# Altium PCB BLE_ADS_ver02.PcbDoc (part 1 of 2)
Units mm, origin at the board's own origin, x right, y up, seen from the top; angles counter-clockwise.
Board outline 74.47 x 53.97 mm, 4 copper layers (Top Layer, GND, PWR, Bottom Layer), stack 0.778 mm thick; 104 components, 72 nets, 369 pads, 122 vias.
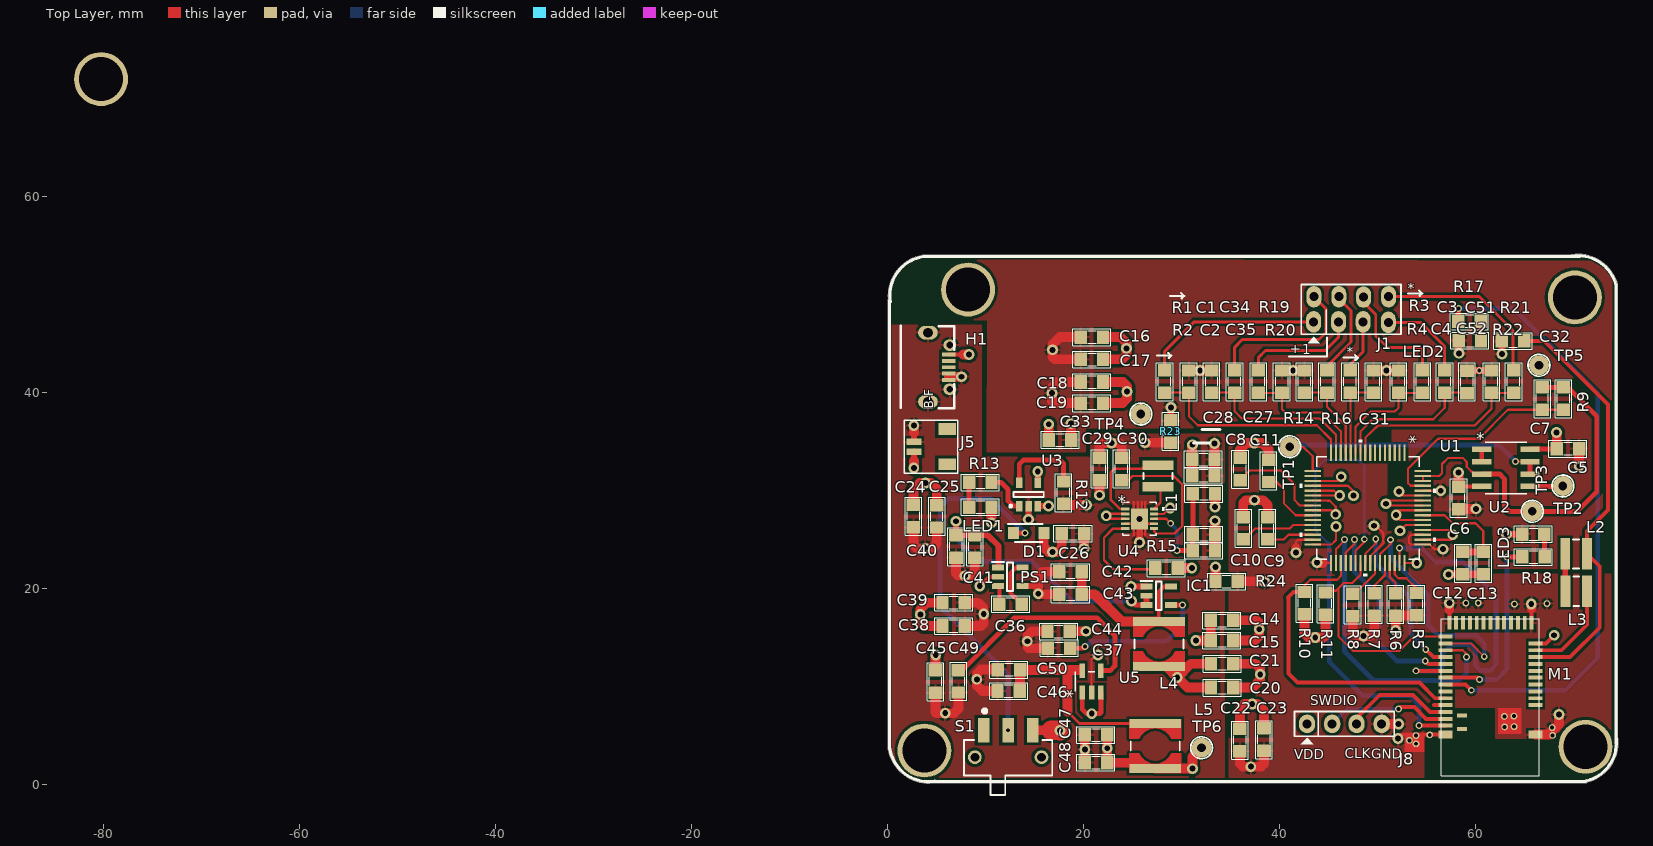
[diagram p0: Top Layer view]
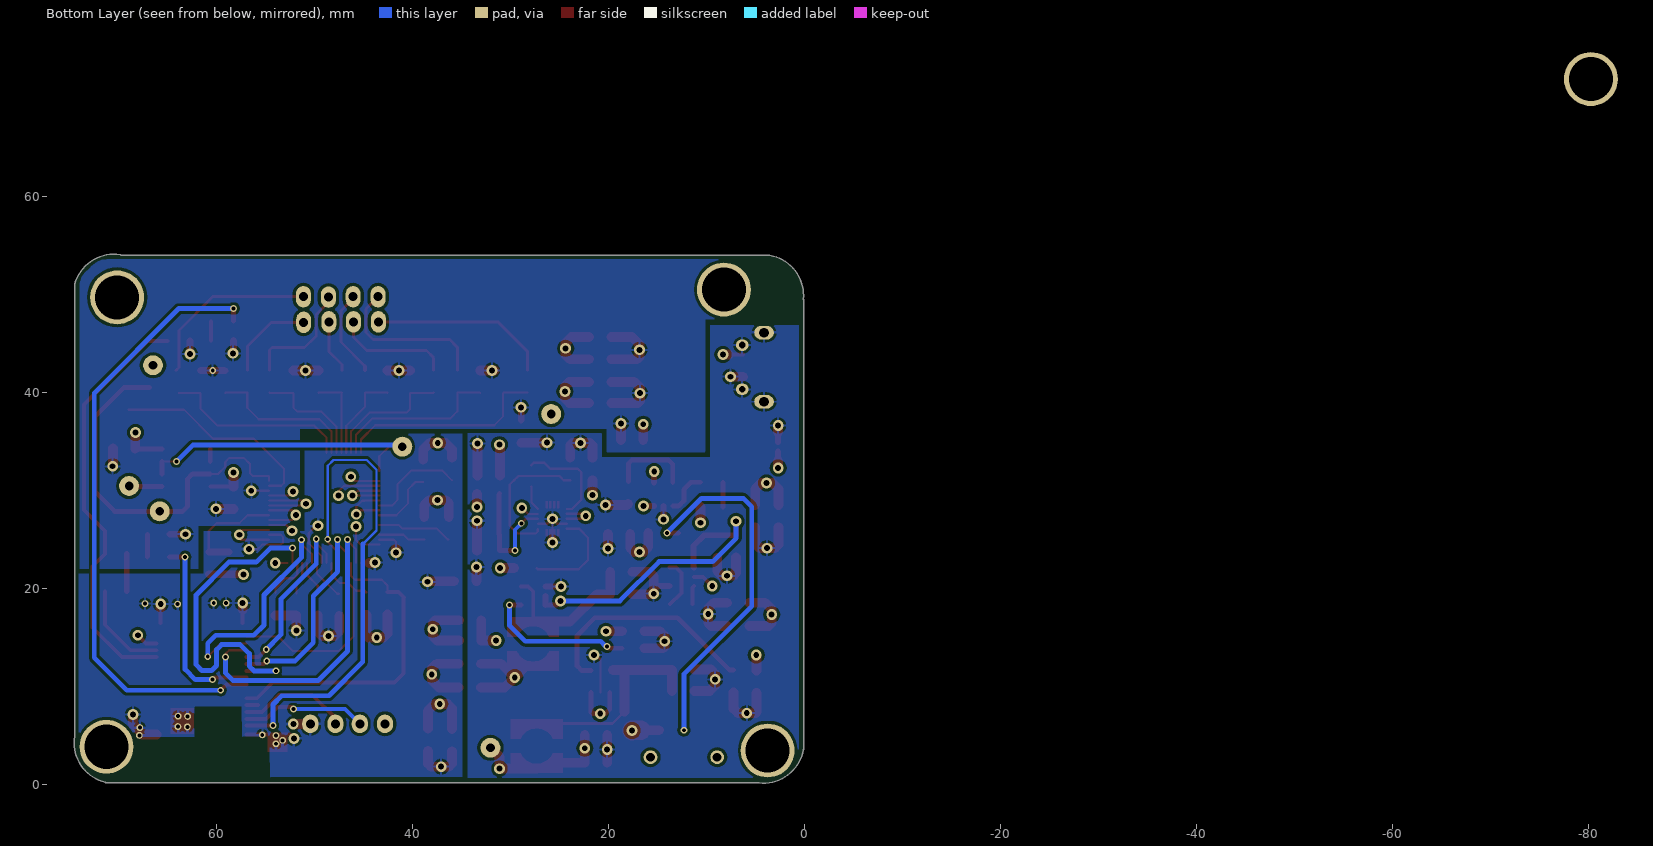
[diagram p1: Bottom Layer view, seen from below]
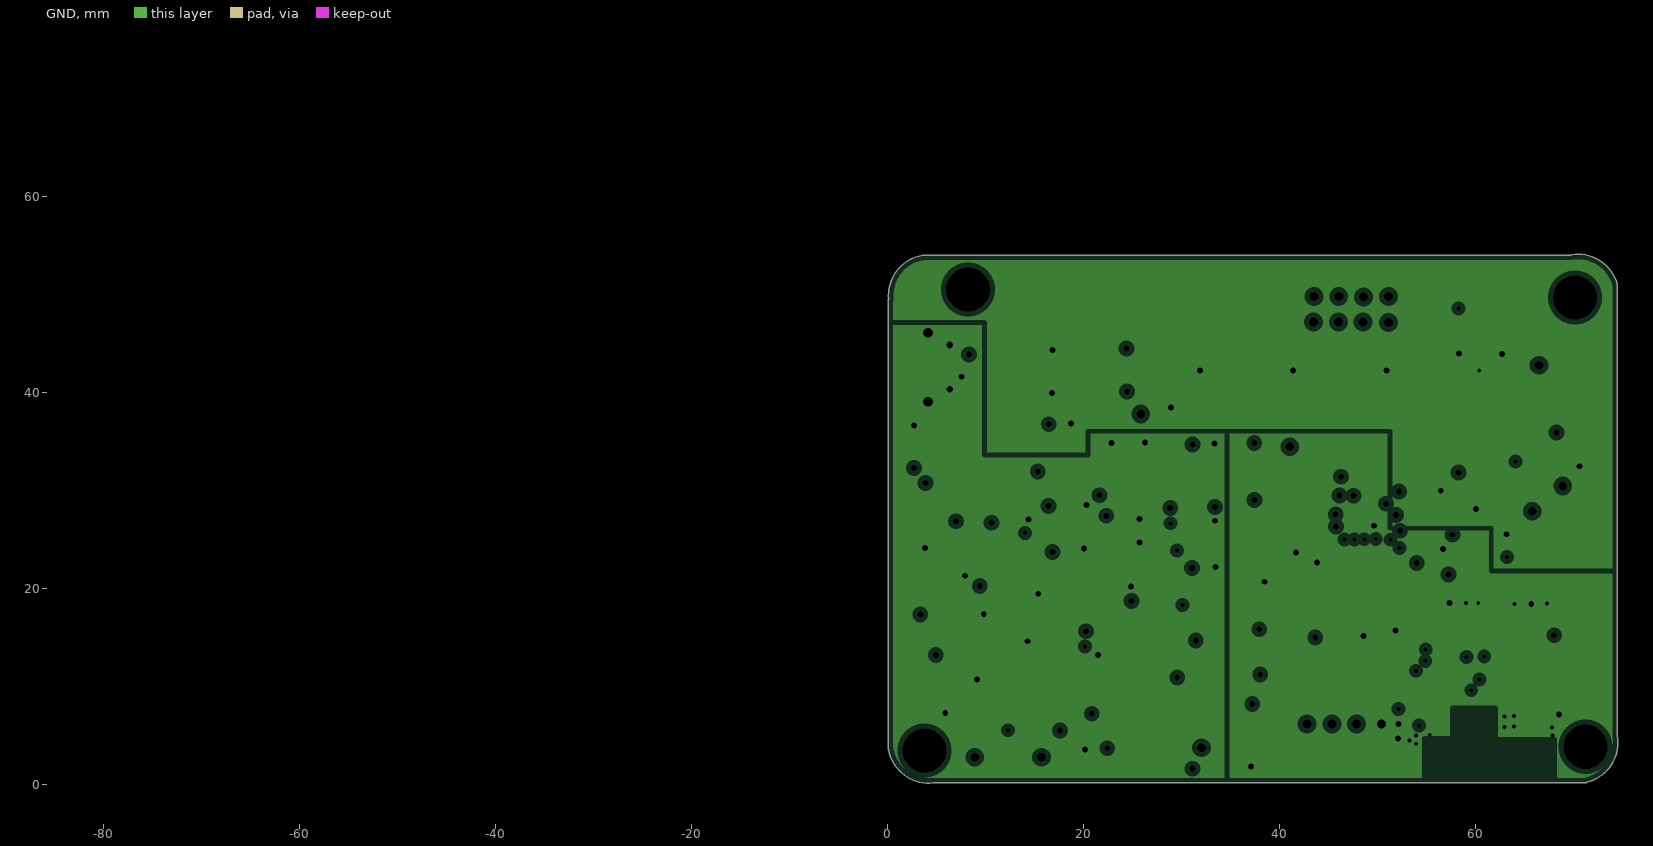
[diagram p2: GND, clearances drawn from the general rule]
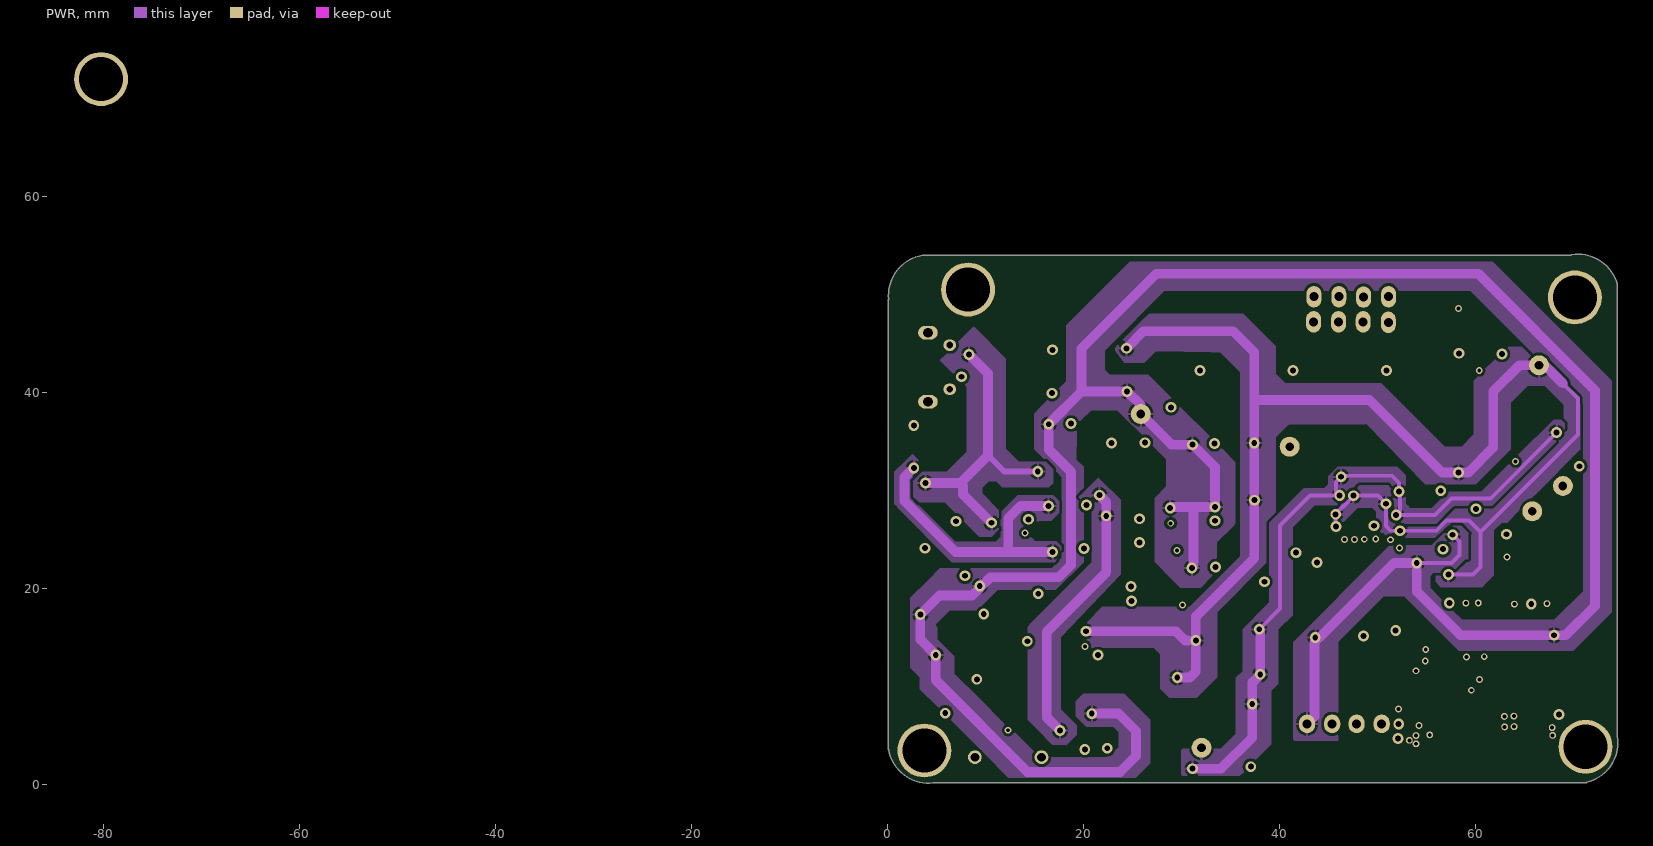
[diagram p3: PWR]
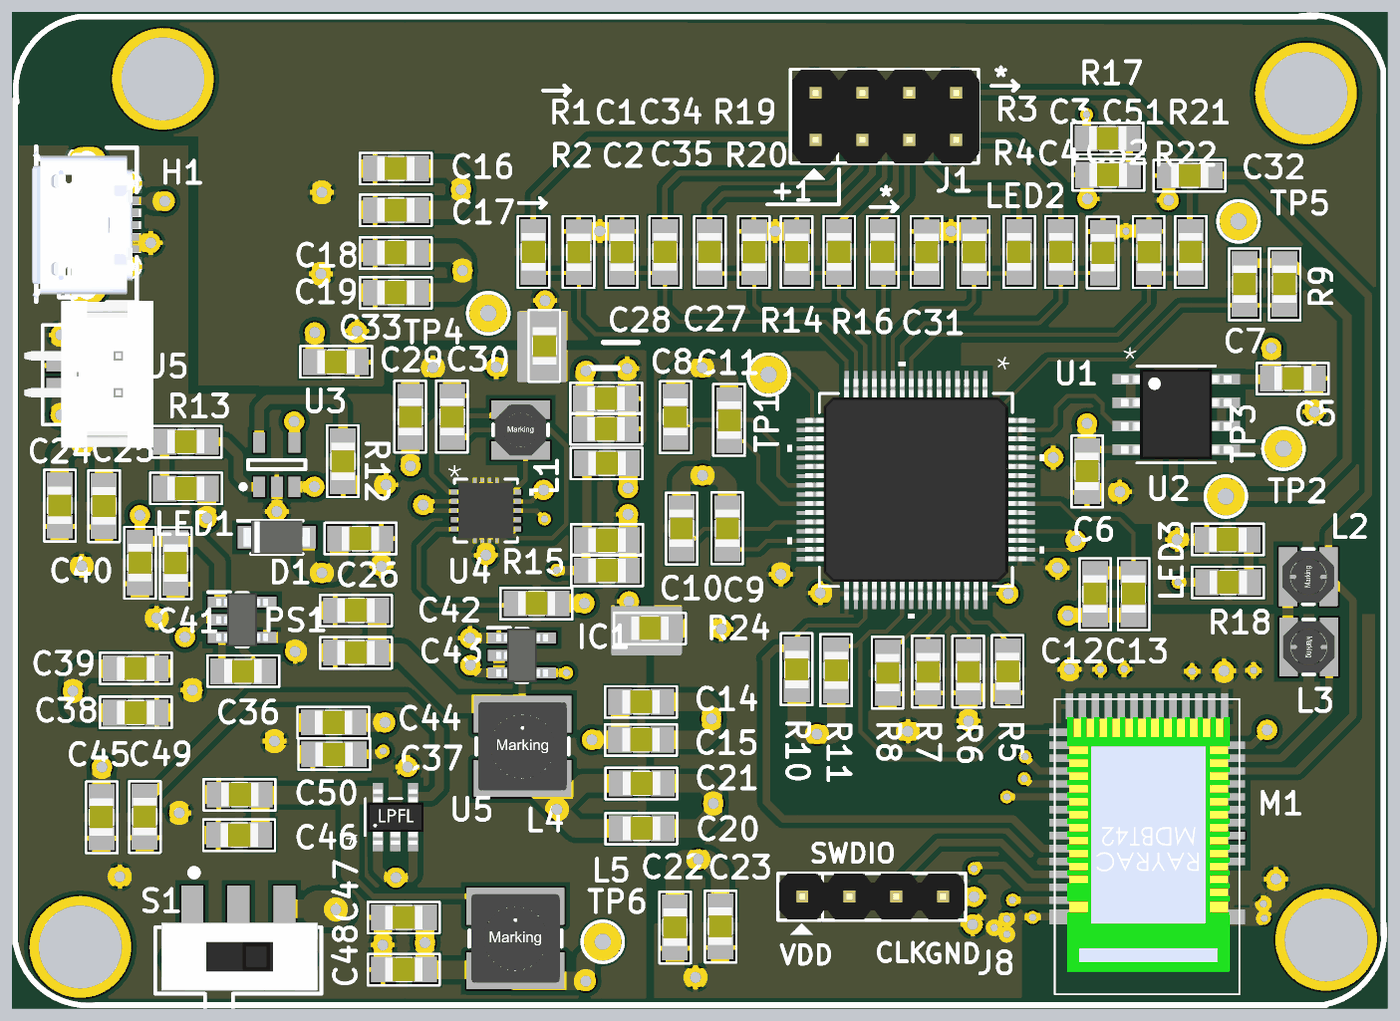
[diagram p5: 3D render of the assembled board from above, using the file's embedded part models]

## Layer stack, top to bottom
Top Solder: solder mask 0.0102, Solder Resist, Dk 3.5
Top Layer: signal copper 0.0356
Dielectric 1: core 0.254, FR-4, Dk 4.2
GND: plane copper 0.036, net (Multiple Nets)
Dielectric 3: prepreg 0.127, Dk 4.2
PWR: signal copper 0.036
Dielectric 2: core 0.254, Dk 4.2
Bottom Layer: signal copper 0.0356
Bottom Solder: solder mask 0.0102, Solder Resist, Dk 3.5

## Board outline
0.104,3.658 0.104,49.428 cw(c0.254,49.428) 0.148,49.535 cw(c4.267,49.936) 3.593,54.019 cw(c3.683,53.899) 3.683,54.049 69.792,54.049 cw(c69.875,53.924) 69.851,54.073 cw(c70.51,49.987) 74.496,51.1 cw(c74.371,51.016) 74.522,51.016 74.522,4.914 cw(c70.434,4.267) 74.572,4.267 cw(c70.434,4.267) 71.394,0.242 cw(c71.272,0.33) 71.272,0.18 4.675,0.18 cw(c4.216,4.293) 0.144,3.555 cw(c0.254,3.658)

## Design rules (kind name [scope] priority, off if disabled: settings)
Clearance [All] p1: gap=0.3
PlaneClearance [All] p1: clearance=0.508
PlaneConnect [All] p1: planeconnectstyle=Relief reliefexpansion=0.508 reliefentries=4 reliefconductorwidth=0.254 reliefairgap=0.254
PolygonConnect [All] p1: connectstyle=Relief reliefconductorwidth=0.254 reliefentries=4 polygonreliefangle="90 Angle" airgapwidth=0.254
RoutingVias Vias_GND_PWR [InNetClass('GND_PWR')] p1: holewidth=0.6 width=1.1 viastyle="Through Hole" minholewidth=0.6 minwidth=1.1 maxholewidth=0.6 maxwidth=1.1
RoutingVias Vias_Signal [All] p2: holewidth=0.4 width=0.7 viastyle="Through Hole" minholewidth=0.4 minwidth=0.7 maxholewidth=0.4 maxwidth=0.7
SolderMaskExpansion [All] p1: expansion=0.102
Width GND_PWR [InNetClass('GND_PWR')] p1: maxlimit=2 minlimit=0.22 preferedwidth=1
Width Signal [All] p2: maxlimit=0.7 minlimit=0.22 preferedwidth=0.5
28 further rules are at their usual default settings.

## Classes and differential pairs
component class ADS_ExG: C1 C2 C3 C4 C5 C6 C7 C8 C9 C10 C11 C12 C13 C14 C15 C16 C17 C18 C19 C20 C21 C22 C23 C34 C35 C51 C52 J1 R1 R2 R3 R4 R5 R6 R7 R8 R9 R10 R11 R19 R20 R21 R22 TP1 TP2 TP3 U1 U2
component class "Battery circuit": C24 C25 C26 C27 C28 C29 C30 C31 D1 H1 J5 L1 LED1 R12 R13 R14 R15 R16 S1 TP4 U3 U4
component class "BLE module": C32 C33 J8 L2 L3 LED2 LED3 M1 R17 R18
component class "Power supply": C36 C37 C38 C39 C40 C41 C42 C43 C44 C45 C46 C47 C48 C49 C50 IC1 L4 L5 PS1 R23 R24 TP5 TP6 U5
net class GND_PWR: +2.5V -2.5V AGND DGND DVDD GND_PWR NetC24_2 NetC26_2 NetC40_2 NetC42_2 NetC46_2

## Components (designator, comment, footprint, x,y, rotation, side; value= is the part's Value field where it differs from the comment)
C1 "4.7nF" SM-0805 30.785,41.123 r270 top
C2 "4.7nF" SM-0805 40.284,41.123 r270 top
C3 "4.7nF" SM-0805 49.632,41.123 r270 top
C4 "4.7nF" SM-0805 59.182,41.097 r270 top
C5 "0.1uF" SM-0805 69.469,34.29 r0 top
C6 "0.1uF" SM-0805 58.318,29.261 r90 top
C7 "1nF" SM-0805 66.853,39.395 r90 top
C8 "10uF" SM-0805 36.017,32.207 r90 top
C9 "1uF" SM-0805 38.837,26.162 r270 top
C10 "100uF" SM-0805 36.347,26.162 r90 top
C11 "1uF" SM-0805 38.938,32.029 r270 top
C12 "1uF" SM-0805 58.75,22.606 r90 top
C13 "0.1uF" SM-0805 60.833,22.606 r90 top
C14 "1uF" SM-0805 34.163,16.764 r0 top
C15 "0.1uF" SM-0805 34.163,14.707 r0 top
C16 "1uF" SM-0805 20.879,45.669 r0 top
C17 "0.1uF" SM-0805 20.879,43.409 r0 top
C18 "1uF" SM-0805 20.879,41.097 r0 top
C19 "0.1uF" SM-0805 20.879,38.938 r0 top
C20 "1uF" SM-0805 34.188,9.906 r0 top
C21 "0.1uF" SM-0805 34.188,12.344 r0 top
C22 "1uF" SM-0805 35.992,4.547 r90 top
C23 "0.1uF" SM-0805 38.456,4.597 r90 top
C24 "47uF" SM-0805 2.667,27.407 r90 top
C25 "4uF/10V" SM-0805 5.055,27.381 r90 top
C26 "4uF/10V" SM-0805 18.948,25.603 r180 top
C27 "22uF" SM-0805 32.258,31.547 r180 top
C28 "22uF" SM-0805 32.258,33.198 r180 top
C29 "10uF" SM-0805 21.666,32.207 r270 top
C30 "104" SM-0805 23.927,32.207 r270 top
C31 "10pF" SM-0805 32.309,23.876 r180 top
C32 "1uF" SM-0805 63.881,45.288 r0 top
C33 "10uF" SM-0805 17.628,35.179 r180 top
C34 "4.7nF" SM-0805 33.122,41.123 r270 top
C35 "4.7nF" SM-0805 42.596,41.123 r270 top
C36 "1uF" SM-0805 12.598,18.415 r180 top
C37 "0.01uF" SM-0805 17.526,13.919 r180 top
C38 "10uF" SM-0805 6.782,16.18 r180 top
C39 "1uF" SM-0805 6.782,18.567 r180 top
C40 "10uF" SM-0805 7.01,24.308 r90 top
C41 "2.2uF" SM-0805 8.941,24.282 r90 top
C42 "2.2uF" SM-0805 18.72,21.717 r0 top
C43 "1uF" SM-0805 18.72,19.431 r0 top
C44 "10uF" SM-0805 17.501,15.646 r0 top
C45 "1uF" SM-0805 4.928,10.516 r90 top
C46 "1uF" SM-0805 12.395,9.55 r0 top
C47 "10uF" SM-0805 21.311,5.08 r0 top
C48 "0.1uF" SM-0805 21.311,2.261 r0 top
C49 "1uF" SM-0805 7.264,10.541 r90 top
C50 "2.2uF" SM-0805 12.421,11.735 r0 top
C51 "4.7nF" SM-0805 52.197,41.123 r270 top
C52 "4.7nF" SM-0805 61.671,41.123 r270 top
D1 "SS34FA" SODFL3618X143N 14.427,25.679 r0 top
H1 "USB B Micro/Mini" "USB-B-MICRO-female Tai02" 3.683,42.901 r90 top
IC1 "TPS72325DBVR" SOT95P280X145-5N 27.711,19.279 r0 top
J1 "ECG jump" JP4x2 47.346,48.489 r0 top
J5 "Jumper 2" "J2_JST SH_1MM" 2.718,33.985 r90 top
J8 "Loading" JP4 45.39,6.198 r0 top
L1 "1 uH, 1.75 A" WE-TPC_2811 27.635,31.496 r0 top
L2 "10 uH, 1 A" WE-TPC_2828 70.307,23.546 r90 top
L3 "15 uH, 0.72 A" WE-TPC_2828 70.333,19.736 r270 top
L4 "3.3 uH, 1.95 A" WE-TPC_4818 27.737,14.351 r0 top
L5 "3.3 uH, 1.95 A" WE-TPC_4818 27.356,3.937 r0 top
LED1 "LED" SM-0805 9.5,28.321 r180 top
LED2 "LED" SM-0805 59.461,45.314 r180 top
LED3 "LED" SM-0805 65.938,25.552 r180 top
M1 "MODULE_MDBT42Q" PCB_MDBT42Q_10X16 61.57,0.914 r180 top
PS1 "TPS60403DBVR" SOT95P280X145-5N 12.548,21.209 r0 top
R1 "4.99k" SM-0805 28.321,41.148 r90 top
R2 "4.99k" SM-0805 37.871,41.148 r90 top
R3 "4.99k" SM-0805 47.244,41.148 r90 top
R4 "4.99k" SM-0805 56.896,41.148 r90 top
R5 "10k" SM-0805 54.026,18.415 r270 top
R6 "10k" SM-0805 51.892,18.39 r270 top
R7 "10k" SM-0805 49.708,18.39 r270 top
R8 "10k" SM-0805 47.523,18.339 r270 top
R9 "499k, 01%" SM-0805 69.012,39.395 r90 top
R10 "10k" SM-0805 42.596,18.517 r270 top
R11 "10k" SM-0805 44.729,18.466 r270 top
R12 "2k" SM-0805 18.009,29.794 r270 top
R13 "470" SM-0805 9.5,30.861 r0 top
R14 "1M" SM-0805 32.309,29.693 r0 top
R15 "1M" SM-0805 28.499,22.098 r0 top
R16 "111k" SM-0805 32.309,25.527 r180 top
R17 "1k" SM-0805 59.436,47.295 r0 top
R18 "1k" SM-0805 65.964,23.241 r0 top
R19 "4.99k" SM-0805 35.458,41.148 r90 top
R20 "4.99k" SM-0805 44.882,41.148 r90 top
R21 "4.99k" SM-0805 54.635,41.148 r90 top
R22 "4.99k" SM-0805 63.932,41.148 r90 top
R23 "1k" SM-0805 28.931,36.043 r270 top
R24 "1k" SM-0805 34.646,20.752 r0 top
S1 "JS102011SAQN" JS102011SAQN 12.344,4.547 r0 top
TP1 "TP" TP1 41.072,34.493 r0 top
TP2 "TP" TP1 68.961,30.48 r0 top
TP3 "TP" TP1 65.837,27.889 r0 top
TP4 "TP" TP1 25.883,37.821 r0 top
TP5 "TP" TP1 66.523,42.799 r0 top
TP6 "TP" TP1 32.08,3.759 r0 top
U1 "Part Number: ADS1299IPAGR" PAG64 49.047,28.245 r270 top
U2 "Part Number: OPA2376AIDR" D8 63.144,32.334 r0 top
U3 "MCP73832T-2ACI/OT" SOT-23-OT5_N 14.427,29.616 r90 top
U4 "Part Number: TPS63060DSCR" DSC10_1P70X2P15 25.756,27.127 r0 top
U5 "TPS73225DBVR" DBV5 20.853,10.516 r90 top

## Footprints (in the part's own frame and the unit in brackets; to place one, negate y for a bottom-side part, rotate by r counter-clockwise, add the part's x,y. Pads: shape width x height; smd on the part's side, far side on the other; paste and mask are expansions set on the pad)
D8 [mil]
  rect 78x22 smd paste+0 mask+0: 1(-97,75) 2(-97,25) 3(-97,-25) 4(-97,-75) 5(97,-75) 6(97,-25) 7(97,25) 8(97,75)
  silkscreen extent -84,-104 84,104, body extent -118,-96 118,96, height 69
DBV5 [mil]
  rect 58x22 smd paste+0 mask+0: 1(-44,37.4) 2(-44,0) 3(-44,-37.4) 4(44,-37.4) 5(44,37.4)
  silkscreen extent -40,-13 40,65, body extent -59,-60 59,60, height 51
DSC10_1P70X2P15 [mm]
  rect 0.85x0.28 smd: 1(-1.475,1) 2(-1.475,0.5) 3(-1.475,0) 4(-1.475,-0.5) 5(-1.475,-1) 6(1.475,-1) 7(1.475,-0.5) 8(1.475,0) 9(1.475,0.5) 10(1.475,1)
  rect 1.7x2.15 smd paste-1.062 mask-1.067: 11(0,0)
  Top Layer region: -0.1,1.775 -0.1,1.075 -0.3,1.075 -0.3,1.775
  Top Layer region: 0.1,1.775 0.1,1.075 0.3,1.075 0.3,1.775
  Top Layer region: -0.5,1.775 -0.5,1.075 -0.7,1.075 -0.7,1.775
  Top Layer region: 0.5,1.775 0.5,1.075 0.7,1.075 0.7,1.775
  Top Layer region: -0.1,-1.775 -0.1,-1.075 -0.3,-1.075 -0.3,-1.775
  Top Layer region: 0.1,-1.775 0.1,-1.075 0.3,-1.075 0.3,-1.775
  Top Layer region: -0.5,-1.775 -0.5,-1.075 -0.7,-1.075 -0.7,-1.775
  Top Layer region: 0.5,-1.775 0.5,-1.075 0.7,-1.075 0.7,-1.775
  silkscreen extent -1.7,-1.7 2.59,1.7, body extent -1.55,-1.55 1.55,1.55, height 0.75
"J2_JST SH_1MM" [mm] "Jum select vdd or gnd"
  rect 1.2x1.8 smd: 0(-1.3,-3.4) 0(2.3,-3.4)
  rect 0.65x1.55 smd: 1(0,0) 2(1,0)
  silkscreen extent -2.2,-4.47 3.2,0.97, body extent -3.45,-5.03 4.5,1.97, height 6.6
JP4 [mil] "Jumper 4"
  oval 65x75 hole 36: 1(-100,0) 2(1,0) 3(99,0) 4(200,0)
  silkscreen extent -150,-81 250,50, body extent -148,-48 248,50, height 323
JP4x2 [mil] "Connector 4x2"
  oval 60x86 hole 36: 1(-150.5,-49.5) 2(-50.5,-49.5) 3(48.5,-49.5) 4(149.5,-51.5) 5(-149.5,51.5) 6(-49.5,51.5) 7(50,50) 8(150.5,51.5)
  silkscreen extent -200,-135 200,100, body extent -197,-100 203,100, height 335
JS102011SAQN [mm]
  rect 1.2x2.5 smd: 1(-2.5,1) 2(0,1) 3(2.5,1)
  round 1.4 hole 0.9: 4(-3.4,-1.75) 5(3.4,-1.75)
  silkscreen extent -4.5,-5.6 4.5,3.12, body extent -4.18,-3.45 4.32,0.25, height 6.5
PAG64 [mil]
  rect 65.5x9 smd paste+0 mask+0: 1(-221.25,147.64) 2(-221.25,127.95) 3(-221.25,108.27) 4(-221.25,88.58) 5(-221.25,68.9) 6(-221.25,49.21) 7(-221.25,29.53) 8(-221.25,9.84) 9(-221.25,-9.84) 10(-221.25,-29.53) 11(-221.25,-49.21) 12(-221.25,-68.9) 13(-221.25,-88.58) 14(-221.25,-108.27) 15(-221.25,-127.95) 16(-221.25,-147.64) 33(221.25,-147.64) 34(221.25,-127.95) 35(221.25,-108.27) 36(221.25,-88.58) 37(221.25,-68.9) 38(221.25,-49.21) 39(221.25,-29.53) 40(221.25,-9.84) 41(221.25,9.84) 42(221.25,29.53) 43(221.25,49.21) 44(221.25,68.9) 45(221.25,88.58) 46(221.25,108.27) 47(221.25,127.95) 48(221.25,147.64)
  rect 9x65.5 smd paste+0 mask+0: 17(-147.64,-221.25) 18(-127.95,-221.25) 19(-108.27,-221.25) 20(-88.58,-221.25) 21(-68.9,-221.25) 22(-49.21,-221.25) 23(-29.53,-221.25) 24(-9.84,-221.25) 25(9.84,-221.25) 26(29.53,-221.25) 27(49.21,-221.25) 28(68.9,-221.25) 29(88.58,-221.25) 30(108.27,-221.25) 31(127.95,-221.25) 32(147.64,-221.25) 49(147.64,221.25) 50(127.95,221.25) 51(108.27,221.25) 52(88.58,221.25) 53(68.9,221.25) 54(49.21,221.25) 55(29.53,221.25) 56(9.84,221.25) 57(-9.84,221.25) 58(-29.53,221.25) 59(-49.21,221.25) 60(-68.9,221.25) 61(-88.58,221.25) 62(-108.27,221.25) 63(-127.95,221.25) 64(-147.64,221.25)
  silkscreen extent -274,-274 274,274, body extent -237,-236 235,236, height 47
PCB_MDBT42Q_10X16 [mm]
  rect 1.4x0.8 smd mask+0: 1(-4.6,-4.2) 39(4.6,-4.2)
  rect 1.4x0.4 smd mask+0: 2(-4.6,-7.2) 3(-4.6,-7.9) 5(-4.6,-9.3) 6(-4.6,-10) 7(-4.6,-10.7) 8(-4.6,-11.4) 9(-4.6,-12.1) 10(-4.6,-12.8) 11(-4.6,-13.5) 25(4.6,-14.2) 26(4.6,-13.5) 27(4.6,-12.8) 28(4.6,-12.1) 29(4.6,-11.4) 30(4.6,-10.7) 31(4.6,-10) 32(4.6,-9.3) 33(4.6,-8.6) 34(4.6,-7.9) 35(4.6,-7.2) 36(4.6,-6.5) 37(4.6,-5.8) 38(4.6,-5.1)
  rect 1.4x0.4 smd: 4(-4.6,-8.6)
  rect 0.4x1.4 smd mask+0: 12(-4.2,-15.6) 13(-3.5,-15.6) 14(-2.8,-15.6) 15(-2.1,-15.6) 16(-1.4,-15.6) 17(-0.7,-15.6) 18(0,-15.6) 19(0.7,-15.6) 20(1.4,-15.6) 21(2.1,-15.6) 22(2.8,-15.6) 23(3.5,-15.6) 24(4.2,-15.6)
  rect 1x0.4 smd mask+0: 40(2.9,-4.75) 41(2.9,-6.15)
  silkscreen extent -5,-16 5,0, body extent -4.48,-15.03 4.32,-1.23, height 1.8
SM-0805 [mil] "Compoment SMD 80x50mil"
  rect 50x55 smd: 1(-45,0) 2(45,0)
  silkscreen extent -77,-34 76,33, body extent -40,-25 40,25, height 24
SODFL3618X143N [mm]
  rect 1.12x1.22 smd: 1(-1.55,0) 2(1.55,0)
  silkscreen extent -2.11,-0.9 1.4,0.9, body extent -1.8,-0.9 1.8,0.9, height 1.43
SOT95P280X145-5N [mm]
  rect 1.2x0.6 smd: 1(-1.25,0.95) 2(-1.25,0) 3(-1.25,-0.95) 4(1.25,-0.95) 5(1.25,0.95)
  silkscreen extent -1.85,-1.45 0.3,1.5, body extent -1.4,-1.45 1.4,1.45, height 1.45
SOT-23-OT5_N [mm] "SOT23, 5-Leads, Body 2.9x1.6mm, Pitch 0.95mm, Lead Span 2.7mm, IPC Medium Density"
  rect 1.1x0.65 smd: 1(-1.2,0.95) 2(-1.2,0) 3(-1.2,-0.95) 4(1.2,-0.95) 5(1.2,0.95)
  silkscreen extent -1.32,-1.55 0.25,1.95, body extent -0.9,-1.55 0.9,1.55, height 1.45
TP1 [mil] "Test point"
  round 80 hole 35: 1(0,0)
  silkscreen extent -44,-44 44,44
"USB-B-MICRO-female Tai02" [mm] "micro usb female type B"
  rect 0.4x1.35 smd: 1(1,-2.6) 2(0.35,-2.6) 3(-0.3,-2.6) 4(-0.95,-2.6) 5(-1.6,-2.6)
  oval 1.4x2 hole 1: 5(-3.825,-0.475) 5(3.225,-0.475)
  oval 1.15x1.3 hole 0.7: 5(-2.55,-2.7) 5(1.95,-2.7)
  silkscreen extent -4.5,-3.15 3.95,2.3, body extent -4.4,-3.43 3.8,2.5, height 2.67
WE-TPC_2811 [mm] "Power Inductor, SMD, 2-Leads, body 2.78x2.78mm"
  rect 3.2x1 smd: 1(0,1.1) 2(0,-1.1)
  silkscreen extent -1.49,-0.3 1.49,0.3, body extent -1.39,-1.39 1.39,1.39, height 1.16
WE-TPC_2828 [mm] "Power Inductor, SMD, 2-Leads, body 2.8x2.8mm"
  rect 3.2x1 smd: 1(0,1.1) 2(0,-1.1)
  silkscreen extent -1.49,-0.3 1.49,0.3, body extent -1.4,-1.4 1.4,1.4, height 2.82
WE-TPC_4818 [mm] "Power Inductor, SMD, 2-Leads, body 4.8x4.8mm"
  rect 5.3x0.9 smd paste-403.566 mask-403.566: 1(0,2.3) 2(0,-2.3)
  Top Layer region: -2.65,0.75 -1.636,0.75 -1.636,0.75 -1.138,1.394 -0.407,1.753 0.407,1.753 1.138,1.394 1.636,0.75 1.636,0.75 2.65,0.75 2.65,0.75 2.65,2.75 -2.65,2.75
  Top Layer region: 2.65,-0.75 1.636,-0.75 1.636,-0.75 1.138,-1.394 0.407,-1.753 -0.407,-1.753 -1.138,-1.394 -1.636,-0.75 -1.636,-0.75 -2.65,-0.75 -2.65,-0.75 -2.65,-2.75 2.65,-2.75
  silkscreen extent -2.5,-0.45 2.5,0.45, body extent -2.4,-2.4 2.4,2.4, height 1.8

## Part data
C1 C2 C3 C4 C5 C6 C7 C8 C9 C10 C11 C12 C13 C14 C15 C16 C17 C18 C19 C20 C21 C22 C23 C24 C25 C26 C27 C28 C29 C30 C31 C32 C33 C34 C35 C36 C37 C38 C39 C40 C41 C42 C43 C44 C45 C46 C47 C48 C49 C50 C51 C52: library part CM, "Cap SMD"
D1: "Schottky Diode"
H1: library part "USB B Female Micro/Mini SMD", "USB B Female Micro/Mini SMD"
IC1: "Integrated Circuit"
J1: library part JP4x2, "Connector 4x2"
J5: library part "JP 2"
J8: library part JP4, "Connector 4"
L1: library part 744028001, "SMT Shielded Tiny Power Inductor WE-TPC, size 2811, 1 uH, 1.75 A"
L2: library part 744025100, "SMT Shielded Tiny Power Inductor WE-TPC, size 2828, 10 uH, 1 A"
L3: library part 744025150, "SMT Shielded Tiny Power Inductor WE-TPC, size 2828, 15 uH, 0.72 A"
L4 L5: library part 744042003, "SMT Shielded Tiny Power Inductor WE-TPC, size 4818, 3.3 uH, 1.95 A"
LED1 LED2 LED3: "LED Single colour Green and Red"
M1: "MDBT42Q"
PS1: "Power Supply"
R1 R2 R3 R4 R5 R6 R7 R8 R9 R10 R11 R12 R13 R14 R15 R16 R17 R18 R19 R20 R21 R22 R23 R24: library part R, "Resistor 1/4W"
S1: "Switch"
TP1 TP2 TP3 TP4 TP5 TP6: library part TP1, "Test Point"
U1: library part ADS1299IPAGR, "No Description Available"
U2: library part OPA2376AIDR, "No Description Available"
U3: "Miniature Single-Cell, Fully Integrated Li-Ion, Li-Polymer Charge Management Controller, 4.2V, 5-Pin SOT-23, Industrial Temperature, Tape and Reel"
U4: library part TPS63060DSCR, "No Description Available"
U5: "No Description Available"

## Free pads (board coordinates)
  round 5.5 hole 4.5 mask+0.1: 0(-80.239,72.009) 0(3.785,3.48) 0(8.255,50.521) 0(70.18,49.733) 0(71.272,3.861)
  round 0.7 hole 0.4 mask+0.1: 1(53.289,4.521) 1(53.975,4.166) 1(53.975,5.004) 1(55.372,5.08) 1(59.055,18.517) 1(60.325,18.542) 1(62.992,6.96) 1(63.017,5.893) 1(63.957,6.985) 1(63.983,5.918) 1(64.008,18.415) 1(67.335,18.466) 1(67.869,5.817) 1(67.92,5.029)

## Via types
v1: diameter 1.1, hole 0.6, Top Layer to Bottom Layer, 97 vias
v2: diameter 0.7, hole 0.4, Top Layer to Bottom Layer, 25 vias

## Nets (pads, with @x,y where several pads share a name; then routed paths per layer and width w, separated by ;. In a path a pad name is that pad's centre, name@x,y a point inside that pad or via, vN(x,y) a via of type N, cw(c..) or ccw(c..) an arc to the next point about the centre after c; other vN are vias at no path point)
1+: J1.1 R1.2 | length 18.4
  Top Layer w0.3: R1.2@28.321,42.291 28.321,44.221 31.331,47.231 J1.1@43.523,47.231
1-: J1.5 R19.2 | length 16.5
  Top Layer w0.3: R19.2@35.458,42.291 35.458,44.628 36.246,45.415 44.069,45.415 44.785,46.131 44.785,48.56 J1.5@43.548,49.797
2+: J1.2 R2.2 | length 11.9
  Top Layer w0.3: R2.2@37.871,42.291 37.871,43.561 38.608,44.298 44.704,44.298 46.063,45.657 J1.2@46.063,47.231
2-: J1.6 R20.2 | length 8.9
  Top Layer w0.3: R20.2@44.882,42.697 47.346,45.161 47.346,48.362 J1.6@46.088,49.619
  Top Layer w0.4: R20.2@44.882,42.291 R20.2@44.882,42.697
3+: J1.3 R3.2 | length 5.5
  Top Layer w0.3: R3.2@47.244,42.291 47.244,42.875 48.578,44.209 J1.3@48.578,47.231
3-: J1.7 R21.2 | length 11.9
  Top Layer w0.3: J1.7@48.616,49.759 48.616,49.237 49.86,47.993 49.86,45.796 51.054,44.602 54.381,44.602 54.635,44.348 R21.2@54.635,42.291
4+: J1.4 R4.2 | length 9.2
  Top Layer w0.3: J1.4@51.143,47.18 54.419,47.18 56.896,44.704 R4.2@56.896,42.291
4-: J1.8 R22.2 | length 18.7
  Top Layer w0.3: J1.8@51.168,49.441 J1.8@51.168,49.797 60.439,49.797 63.881,46.355 63.881,42.57 R22.2@64.16,42.291
+2.5V: C5.1 C14.2 C15.2 C20.2 C21.2 C22.2 C23.2 C47.2 C48.2 L5.2 TP6.1 U1.19 U1.21 U1.22 U1.54 U1.56 U1.59 U2.8 | length 123.5
  Top Layer w0.22: U1.22@43.428,29.495 v1(46.177,29.495) 45.596,29.995 U1.21@43.428,29.995 ; U1.19@43.428,30.995 45.905,30.995 v1(46.33,31.42) ; v1(51.943,27.508) 51.943,27.356 52.304,26.995 U1.54@54.667,26.995 ; v1(52.222,29.921) 52.649,29.495 U1.59@54.667,29.495 ; 52.226,27.995 53.416,27.995 U1.56@54.667,27.995
  Top Layer w0.5: U2.8@65.608,34.239 68.275,34.239 C5.1@68.326,34.29
  Top Layer w1: C47.2@22.454,5.08 v1(22.454,3.708) C48.2@22.454,2.261 22.479,2.235 25.044,2.235 25.019,2.21 25.019,2.108 ; L5.2@27.356,1.637 31.154,1.637 v1(31.166,1.626) 31.166,2.845 TP6.1@32.08,3.759 ; C15.2@35.306,14.707 37.516,14.707 37.973,15.164 v1(37.973,15.85) 37.973,16.485 37.694,16.764 C14.2@35.306,16.764 ; C20.2@35.331,9.906 37.313,9.906 38.075,10.668 v1(38.075,11.252) 38.075,11.836 37.567,12.344 C21.2@35.331,12.344 ; C22.2@35.992,5.69 35.992,7.772 36.449,8.23 v1(37.262,8.23) 37.77,8.23 38.456,7.544 C23.2@38.456,5.74 ; v1(68.301,35.941) 68.326,35.916 C5.1@68.326,34.29
  PWR w0.4: v1(37.973,15.85) 40.107,17.983 40.107,26.441 43.16,29.495 v1@45.791,29.495 ; v1(46.177,29.495) v1@45.791,29.495 ; v1(68.301,35.941) 68.301,35.916 61.595,29.21 57.607,29.21 55.905,27.508 v1(51.943,27.508) 52.324,27.889 52.324,29.82 v1(52.222,29.921) 52.222,30.81 51.511,31.521 46.431,31.521 v1(46.33,31.42) 45.791,30.881 v1@45.791,29.495
  PWR w1: v1(31.166,1.626) 34.087,1.626 37.262,4.801 v1(37.262,8.23) 37.262,10.439 v1(38.075,11.252) 38.075,15.748 v1(37.973,15.85)
-2.5V: C6.2 C8.2 C9.1 C10.2 C11.1 C12.1 C13.1 C14.1 C15.1 C16.2 C17.2 C20.1 C21.1 C44.2 L4.2 TP5.1 U1.20 U1.23 U1.25 U1.32 U1.53 U1.57 U1.58 U2.4 | length 218.7
  Top Layer w0.22: U1.32@43.428,24.495 45.323,24.495 45.796,24.968 v1(45.796,26.34) ; U1.25@43.428,27.995 45.36,27.995 v1(45.771,27.584) 45.771,28.372 45.168,28.975 44.919,28.975 ; U1.23@43.428,28.995 44.919,28.995 ; U1.20@43.428,30.495 47.026,30.495 47.6,29.921 v1(47.6,29.489) ; v1(52.349,25.908) 52.936,26.495 U1.53@54.667,26.495 ; U1.57@54.667,28.495 51.083,28.495 v1(50.915,28.663) 50.915,28.995 U1.58@54.667,28.995
  Top Layer w0.4: C6.2@58.318,30.404 58.344,30.429 U2.4@60.681,30.429
  Top Layer w0.8: v1(57.277,21.438) 57.302,21.463 C12.1@58.75,21.463 C13.1@60.833,21.463
  Top Layer w1: C44.2@18.644,15.646 v1(20.295,15.646) ; C17.2@22.022,43.409 23.978,43.409 24.409,43.84 v1(24.409,44.526) 24.409,45.06 23.8,45.669 C16.2@22.022,45.669 ; L4.2@28.487,12.051 v1(29.604,10.935) ; v1(31.496,14.707) C15.1@33.02,14.707 C14.1@33.02,16.764 ; C20.1@33.045,9.906 30.632,9.906 v1(29.604,10.935) ; C21.1@33.045,12.344 31.013,12.344 v1(29.604,10.935) ; C8.2@36.017,33.35 36.017,34.214 36.678,34.874 v1(37.465,34.874) 38.278,34.874 38.938,34.214 C11.1@38.938,33.172 ; C10.2@36.347,27.305 36.347,28.753 36.627,29.032 v1(37.49,29.032) 38.354,29.032 38.837,28.55 C9.1@38.837,27.305 ; C6.2@58.318,30.404 v1(58.318,31.852)
  PWR w0.4: v1(45.796,26.34) 45.771,26.365 v1(45.771,27.584) 45.771,27.661 46.555,28.445 46.612,28.445 47.6,29.432 v1(47.6,29.489) 50.089,29.489 v1(50.915,28.663) 50.893,28.641 50.893,26.399 51.384,25.908 v1(52.349,25.908) 56.058,25.908 57.099,26.949 59.385,26.949 60.554,25.781 ; v1(57.277,21.438) 59.792,21.438 60.554,22.2 60.554,25.781 ; 68.948,40.957 70.485,39.421 70.485,35.712 60.554,25.781
  PWR w1: v1(20.295,15.646) 29.464,15.646 30.404,14.707 v1(31.496,14.707) ; v1(24.409,44.526) 26.162,46.279 35.306,46.279 37.465,44.12 37.465,39.268 ; v1(29.604,10.935) 30.874,10.935 31.496,11.557 v1(31.496,14.707) ; TP5.1@66.523,42.799 64.541,42.799 61.849,40.107 61.849,34.392 59.309,31.852 v1(58.318,31.852) 56.642,31.852 49.225,39.268 37.465,39.268 ; TP5.1@66.878,43.028 68.948,40.957 ; v1(31.496,14.707) 31.496,17.145 37.465,23.114 v1(37.465,34.874) 37.465,39.268
AGND: C1.1 C2.1 C3.1 C4.1 C5.2 C6.1 C16.1 C17.1 C18.1 C19.1 C32.1 C33.1 C34.1 C35.1 C51.1 C52.1 LED2.2 LED3.2 R23.1 U1.60 | length 37
  Top Layer w0.22: U1.60@54.667,29.995 v1(56.492,29.995) v1@56.566,29.921
  Top Layer w0.7: R23.1@28.931,37.186 28.931,38.684 28.956,38.659 v1(28.956,38.506) v1@28.981,38.532 ; LED2.2@58.318,45.314 58.318,44.044 v1(58.344,44.018) ; C4.1@59.182,42.24 59.207,42.266 v2(60.427,42.266) C52.1@61.671,42.266 ; v1(62.738,43.942) C32.1@62.738,45.288 ; v1(63.195,25.552) LED3.2@64.795,25.552
  Top Layer w1: C33.1@18.771,35.179 v1(18.771,36.855) ; C19.1@19.736,38.938 17.043,38.938 16.815,39.167 v1(16.815,39.954) 16.815,40.513 17.399,41.097 C18.1@19.736,41.097 ; C17.1@19.736,43.409 17.12,43.409 16.866,43.663 v1(16.866,44.374) 16.866,44.907 17.628,45.669 C16.1@19.736,45.669 ; v1@31.674,42.266 v1(31.928,42.266) C34.1@33.122,42.266 ; C2.1@40.284,42.266 v1(41.427,42.266) C35.1@42.596,42.266 ; C3.1@49.632,42.266 v1(50.952,42.266) C51.1@52.197,42.266 ; C6.1@58.318,28.118 60.096,28.118 v1(60.096,28.143) v1@60.071,28.169 ; C5.2@70.612,34.29 70.612,32.512 v1(70.637,32.487)
BIAS: C7.2 R9.2 TP3.1 U1.62 U1.63 U2.3 | length 39.1
  Top Layer w0.22: U1.62@54.667,30.995 U1.63@54.667,31.495 56.336,31.495 56.617,31.775 56.617,32.715 57.252,33.35 58.725,33.35 59.157,32.918 59.157,32.436 59.893,31.699 U2.3@60.681,31.699
  Top Layer w0.5: U2.3@60.681,31.699 62.509,31.699 62.992,31.217 62.992,28.397 63.5,27.889 TP3.1@65.837,27.889 70.434,27.889 72.415,29.87 72.415,37.592 69.469,40.538 R9.2@69.012,40.538 C7.2@66.853,40.538
CS: M1.25 R11.1 U1.39 | length 22.7
  Top Layer w0.22: R11.1@44.855,19.609 R11.1@44.729,19.609 44.907,19.787 45.795,19.787 45.973,19.965 ; U1.39@48.297,22.625 48.297,21.424 47.447,20.574 46.582,20.574 45.973,19.965 ; M1.25@56.97,15.114 53.748,15.114 52.273,13.64 47.549,13.64 46.05,15.138 46.05,19.888 45.973,19.965
DGND: C22.1 C23.1 J8.4 M1.1 M1.12 M1.24 M1.39 pad.1 R5.2 R6.2 R7.2 R8.2 R24.2 U1.31 U1.33 U1.41 U1.49 U1.51 | length 47.3
  Top Layer w0.22: v1@41.732,24.105 41.732,24.816 41.911,24.995 U1.31@43.428,24.995 ; 44.456,22.625 U1.33@45.297,22.625 ; U1.41@49.297,22.625 49.297,23.313 50.62,24.636 50.62,25.679 49.884,26.416 v1(49.682,26.416) ; U1.51@54.667,25.495 53.486,25.495 53.238,25.248 53.238,24.714 53.506,24.495 U1.49@54.667,24.495 55.388,24.495 55.855,24.028 v1(56.718,24.028) v1@56.744,24.054
  Top Layer w0.4: v1(52.121,4.699) 52.536,5.114 M1.39@56.97,5.114 ; M1.24@57.37,16.514 57.37,17.865 ; M1.12@65.77,16.514 v1@65.77,18
  Top Layer w1: R24.2@35.789,20.752 38.557,20.752 v1(38.506,20.701) v1@38.506,20.676 ; C22.1@35.992,3.404 35.992,2.159 36.322,1.829 v1(37.109,1.829) 38.151,1.829 38.456,2.134 C23.1@38.456,3.454 ; v1(41.732,23.673) v1@41.732,24.105 ; v1(43.866,22.657) 43.898,22.625 44.456,22.625 ; R8.2@47.523,17.196 47.523,15.646 48.006,15.164 v1(48.616,15.164) 49.251,15.164 49.708,15.621 R7.2@49.708,17.247 ; J8.4@50.47,6.198 v1(52.197,6.198) ; v1(51.892,15.723) R6.2@51.892,17.247 51.918,17.272 R5.2@54.026,17.272 ; v1@57.328,18.567 v1(57.37,18.526) 57.37,17.865 ; v1(65.735,18.44) 65.77,18.406 v1@65.77,18 ; M1.1@66.17,5.114 67.58,5.114 67.722,5.256 67.722,5.331 68.555,6.163 v1(68.555,7.163)
DRDY: M1.30 U1.47 | length 35.9
  Top Layer w0.22: v2@52.273,24.155 v2(52.297,24.131) U1.47@52.297,22.625
  Top Layer w0.4: v2@53.873,11.709 v2(53.968,11.614) M1.30@56.97,11.614
  Bottom Layer w0.5: v2(52.297,24.131) 54.558,24.131 55.982,22.708 58.776,22.708 62.128,19.355 62.128,12.243 61.519,11.633 60.554,11.633 60.031,12.156 60.031,13.781 59.525,14.288 57.62,14.288 56.693,13.36 56.693,12.09 56.217,11.614 v2(53.968,11.614)
DVDD: C18.2 C19.2 C27.2 C28.2 C33.2 C38.2 C39.2 C45.2 J8.1 M1.11 PS1.2 R10.2 R11.2 R14.2 R15.2 TP4.1 U1.48 U1.50 U1.52 U4.9 U5.1 U5.3 | length 297.9
  Top Layer w0.22: U4.9@27.231,27.627 28.262,27.627 ; 28.262,27.662 28.66,28.06 28.695,28.06 v1(28.88,28.245) ; U1.48@52.797,22.625 v1@53.626,22.625 ; U1.50@54.667,24.995 v1@57.583,24.995 ; U1.52@54.667,25.995 57.419,25.995
  Top Layer w0.4: v1(9.449,20.269) 10.389,21.209 PS1.2@11.298,21.209 ; M1.11@66.17,14.414 67.246,14.414 v1(68.072,15.24)
  Top Layer w0.5: U5.1@19.903,9.398 19.903,7.681 20.345,7.239 v1(20.879,7.239) 21.666,7.239 21.803,7.376 U5.3@21.803,9.398
  Top Layer w1: C45.2@4.928,11.659 4.928,13.208 v1(4.953,13.233) ; C38.2@5.639,16.18 3.708,16.18 3.378,16.51 v1(3.378,17.348) 3.378,17.907 4.039,18.567 C39.2@5.639,18.567 ; C33.2@16.485,35.179 v1(16.485,36.779) ; C19.2@22.022,38.938 24.028,38.938 24.486,39.395 v1(24.486,40.132) 24.486,40.665 24.054,41.097 C18.2@22.022,41.097 ; R15.2@29.642,22.098 v1(31.09,22.098) ; C27.2@31.115,31.547 C28.2@31.115,33.198 31.115,34.646 v1(31.166,34.696) ; v1(33.452,28.346) R14.2@33.452,29.693 ; R10.2@42.596,17.374 42.596,15.418 43.002,15.011 v1(43.688,15.011) 44.526,15.011 44.729,15.215 R11.2@44.729,17.323
  PWR w0.4: v1(54.051,22.631) 57.607,22.631 58.395,23.419 58.395,24.816 v1(57.709,25.502)
  PWR w1: v1(20.879,7.239) 20.904,7.264 23.597,7.264 25.4,5.461 25.4,2.921 23.776,1.297 14.324,1.297 4.953,10.668 v1(4.953,13.233) 3.378,14.808 v1(3.378,17.348) 5.334,19.304 8.661,19.304 9.449,20.091 v1(9.449,20.269) 9.627,20.269 10.516,21.158 17.475,21.158 18.745,22.428 18.745,23.542 18.741,23.545 18.741,24.664 18.745,24.668 18.745,31.928 16.485,34.188 v1(16.485,36.779) 19.837,40.132 ; v1(28.88,28.245) 28.981,28.346 31.267,28.346 ; v1(31.09,22.098) 31.267,22.276 31.267,28.346 ; J8.1@42.85,6.198 43.612,6.96 43.612,14.503 51.74,22.631 v1(54.051,22.631) 54.051,19.71 58.509,15.253 58.496,15.24 v1(68.072,15.24) 69.24,15.24 72.238,18.237 72.238,40.234 60.325,52.146 27.483,52.146 19.837,44.501 19.837,40.132 ; 19.837,40.132 v1(24.486,40.132) 25.883,38.735 TP4.1@25.883,37.821 29.007,34.696 v1(31.166,34.696) 33.452,32.41 v1(33.452,28.346) 31.267,28.346
GND_PWR: C24.1 C25.1 C26.1 C27.1 C28.1 C29.1 C30.1 C31.1 C37.2 C38.1 C39.1 C40.1 C41.1 C42.1 C43.1 C44.1 C45.1 C46.1 C47.1 C48.1 C49.1 C50.1 H1.4 H1.5 IC1.1 J5.2 PS1.4 R12.2 R16.1 R23.2 R24.1 U3.2 U4.4 U4.7 U4.11 U5.2 | length 80.6
  Top Layer w0.22: U5.2@20.853,9.398 20.853,12.776 21.311,13.233 v1(21.514,13.233) ; U4.4@24.281,26.627 25.256,26.627 v1(25.756,27.127) ; v1@25.756,24.943 v1(25.756,27.127) ; U4.7@27.231,26.627 26.256,26.627 v1(25.756,27.127)
  Top Layer w0.6: J5.2@2.718,34.985 2.718,35.966 ; PS1.4@13.798,20.259 15.408,20.259 15.418,20.269 ; v1(14.427,27.076) U3.2@14.427,28.416 ; v1(24.892,20.218) 25.248,20.218 25.258,20.229 IC1.1@26.461,20.229
  Top Layer w1: C24.1@2.667,26.264 2.667,24.511 3.048,24.13 v1(3.861,24.13) 4.597,24.13 5.055,24.587 C25.1@5.055,26.238 ; 2.718,35.966 v1(2.718,36.652) ; C45.1@4.928,9.373 4.928,7.391 5.029,7.29 v1(5.918,7.29) 6.807,7.29 7.264,7.747 C49.1@7.264,9.398 ; 6.283,41.626 7.59,41.626 v1(7.595,41.631) ; C40.1@7.01,23.165 7.01,21.59 7.29,21.311 v1(7.925,21.311) 8.446,21.311 8.941,21.805 C41.1@8.941,23.139 ; C38.1@7.925,16.18 9.55,16.18 9.855,16.485 v1(9.855,17.399) 9.855,17.958 9.246,18.567 C39.1@7.925,18.567 ; C46.1@11.252,9.55 9.703,9.55 9.144,10.109 v1(9.144,10.744) 9.144,11.303 9.576,11.735 C50.1@11.278,11.735 ; C44.1@16.358,15.646 14.783,15.646 14.3,15.164 v1(14.3,14.63) 14.3,14.097 14.478,13.919 C37.2@16.383,13.919 ; C43.1@17.577,19.431 15.469,19.431 v1(15.418,19.482) 15.418,20.269 15.418,21.285 15.85,21.717 C42.1@17.577,21.717 ; R12.2@18.009,28.651 18.136,28.524 v1(20.345,28.524) ; v1(20.091,24.105) C26.1@20.091,25.603 ; C48.1@20.168,2.261 v1(20.168,3.581) C47.1@20.168,5.08 ; C29.1@21.666,33.35 21.666,34.62 21.92,34.874 v1(22.885,34.874) 23.698,34.874 23.927,34.646 C30.1@23.927,33.35 ; v1(25.756,24.714) v1@25.756,24.943 ; v1(26.314,34.9) R23.2@28.931,34.9 ; C27.1@33.401,31.547 C28.1@33.401,33.198 v1(33.401,34.823) v1@33.426,34.849 ; C31.1@33.452,23.876 R16.1@33.452,25.527 v1(33.452,26.924) v1@33.452,26.949 ; R24.1@33.503,20.752 v1(33.503,22.2)
IN1N: C34.2 R19.1 U1.15 | length 17.4
  Top Layer w0.22: C34.2@33.122,39.98 33.147,40.005 R19.1@35.458,40.005 35.458,38.1 36.195,37.363 44.145,37.363 45.797,35.711 U1.15@45.797,33.865
IN1P: C1.2 R1.1 U1.16 | length 21.7
  Top Layer w0.22: R1.1@28.321,40.005 30.759,40.005 C1.2@30.785,39.98 30.785,37.592 31.699,36.678 43.84,36.678 45.297,35.221 U1.16@45.297,33.865
IN2N: C35.2 R20.1 U1.13 | length 9.2
  Top Layer w0.22: C35.2@42.596,39.98 42.621,40.005 R20.1@44.882,40.005 44.882,38.557 46.797,36.642 U1.13@46.797,33.865
IN2P: C2.2 R2.1 U1.14 | length 13.2
  Top Layer w0.22: R2.1@37.871,40.005 37.897,39.98 C2.2@40.284,39.98 40.284,38.303 40.615,37.973 44.399,37.973 46.297,36.075 U1.14@46.297,33.865
IN3N: C51.2 R21.1 U1.11 | length 11.8
  Top Layer w0.22: U1.11@47.797,33.865 47.797,36.52 49.352,38.075 51.816,38.075 52.197,38.456 C51.2@52.197,39.98 54.61,39.98 R21.1@54.635,40.005
IN3P: C3.2 R3.1 U1.12 | length 8.6
  Top Layer w0.22: U1.12@47.297,33.865 47.297,39.952 R3.1@47.244,40.005 49.606,40.005 C3.2@49.632,39.98
IN4N: C52.2 R22.1 U1.9 | length 19.5
  Top Layer w0.22: U1.9@48.797,33.865 48.797,35.386 50.083,36.652 59.969,36.652 61.671,38.354 C52.2@61.671,39.98 R22.1@63.906,39.98
IN4P: C4.2 R4.1 U1.10 | length 15.6
  Top Layer w0.22: U1.10@48.297,33.865 48.297,36.055 ; 48.323,36.081 49.53,37.287 55.728,37.287 56.896,38.456 R4.1@56.896,40.005 59.131,40.005 C4.2@59.182,39.954
MISO: M1.26 U1.43 | length 25.5
  Top Layer w0.22: U1.43@50.297,22.625 50.297,23.5 51.384,24.587 v2(51.384,24.994) ; M1.26@56.97,14.414 59.576,14.414 v2(60.935,13.056)
  Bottom Layer w0.5: v2(51.384,24.994) 51.384,23.165 55.194,19.355 55.194,16.281 56.236,15.24 60.122,15.24 60.935,14.427 v2(60.935,13.056)
MOSI: M1.27 U1.34 | length 32.5
  Top Layer w0.22: U1.34@45.797,22.625 45.797,24.03 46.66,24.892 v2(46.66,25.019) v2@46.634,25.044 ; M1.27@56.97,13.714 58.752,13.714 59.131,13.335 v2(59.131,13.03) v2@59.157,13.005
  Bottom Layer w0.5: v2(46.66,25.019) 46.66,13.64 49.682,10.617 58.344,10.617 59.131,11.405 v2(59.131,13.03)
NetC7_1: C7.1 R9.1 U1.61 | length 21.4
  Top Layer w0.22: U1.61@54.667,30.495 53.427,30.495 53.162,30.759 53.162,32.258 56.21,35.306 60.401,35.306 63.348,38.252 C7.1@66.853,38.252 R9.1@69.012,38.252
NetC8_1: C8.1 U1.24 | length 10.2
  Top Layer w0.22: C8.1@36.017,31.064 37.008,32.055 40.157,32.055 41.58,30.632 41.58,29.032 42.117,28.495 U1.24@43.428,28.495
NetC9_2: C9.2 U1.30 | length 4.8
  Top Layer w0.22: C9.2@38.837,25.019 40.488,25.019 40.963,25.495 U1.30@43.428,25.495
NetC10_1: C10.1 U1.28 | length 7.7
  Top Layer w0.22: C10.1@36.347,25.019 36.449,25.019 37.567,26.137 41.072,26.137 41.43,26.495 U1.28@43.428,26.495
NetC11_2: C11.2 U1.26 | length 6.7
  Top Layer w0.22: C11.2@38.938,30.886 39.726,30.886 40.513,30.099 40.513,28.677 41.695,27.495 U1.26@43.428,27.495
NetC12_2: C12.2 C13.2 U1.55 | length 11.1
  Top Layer w0.22: U1.55@54.667,27.495 56.884,27.495 57.709,26.67 60.046,26.67 60.833,25.883 C13.2@60.833,23.749
  Top Layer w0.7: C12.2@58.75,23.749 C13.2@60.833,23.749
NetC24_2: C24.2 C25.2 H1.1 LED1.1 U3.4 | length 41
  Top Layer w0.4: H1.1@6.283,43.901 7.763,43.901
  Top Layer w0.6: v1@15.367,32.207 v1(15.367,31.953) 15.377,31.943 U3.4@15.377,30.816
  Top Layer w1: C24.2@2.667,28.55 2.667,30.15 3.302,30.785 v1(3.912,30.785) 4.445,30.785 5.055,30.175 C25.2@5.055,28.524 ; 7.763,43.901 7.772,43.891 8.306,43.891 8.331,43.917 v1(8.357,43.891) ; v1(10.643,26.721) LED1.1@10.643,28.321
  PWR w0.6: 10.287,33.604 11.938,31.953 v1(15.367,31.953)
  PWR w1: v1(3.912,30.785) 7.468,30.785 ; v1(8.357,43.891) 10.287,41.961 10.287,33.604 7.468,30.785 ; v1(10.643,26.721) 7.747,29.616 7.747,30.505 7.468,30.785